# Altium PCB CMSIS-DAPF103.PcbDoc (part 2 of 2)
Units mil, origin at the board's own origin, x right, y up, seen from the top; angles counter-clockwise.
Board outline 6000 x 4000 mil, 2 copper layers (Top Layer, Bottom Layer); 33 components, 24 nets, 133 pads, 37 vias.
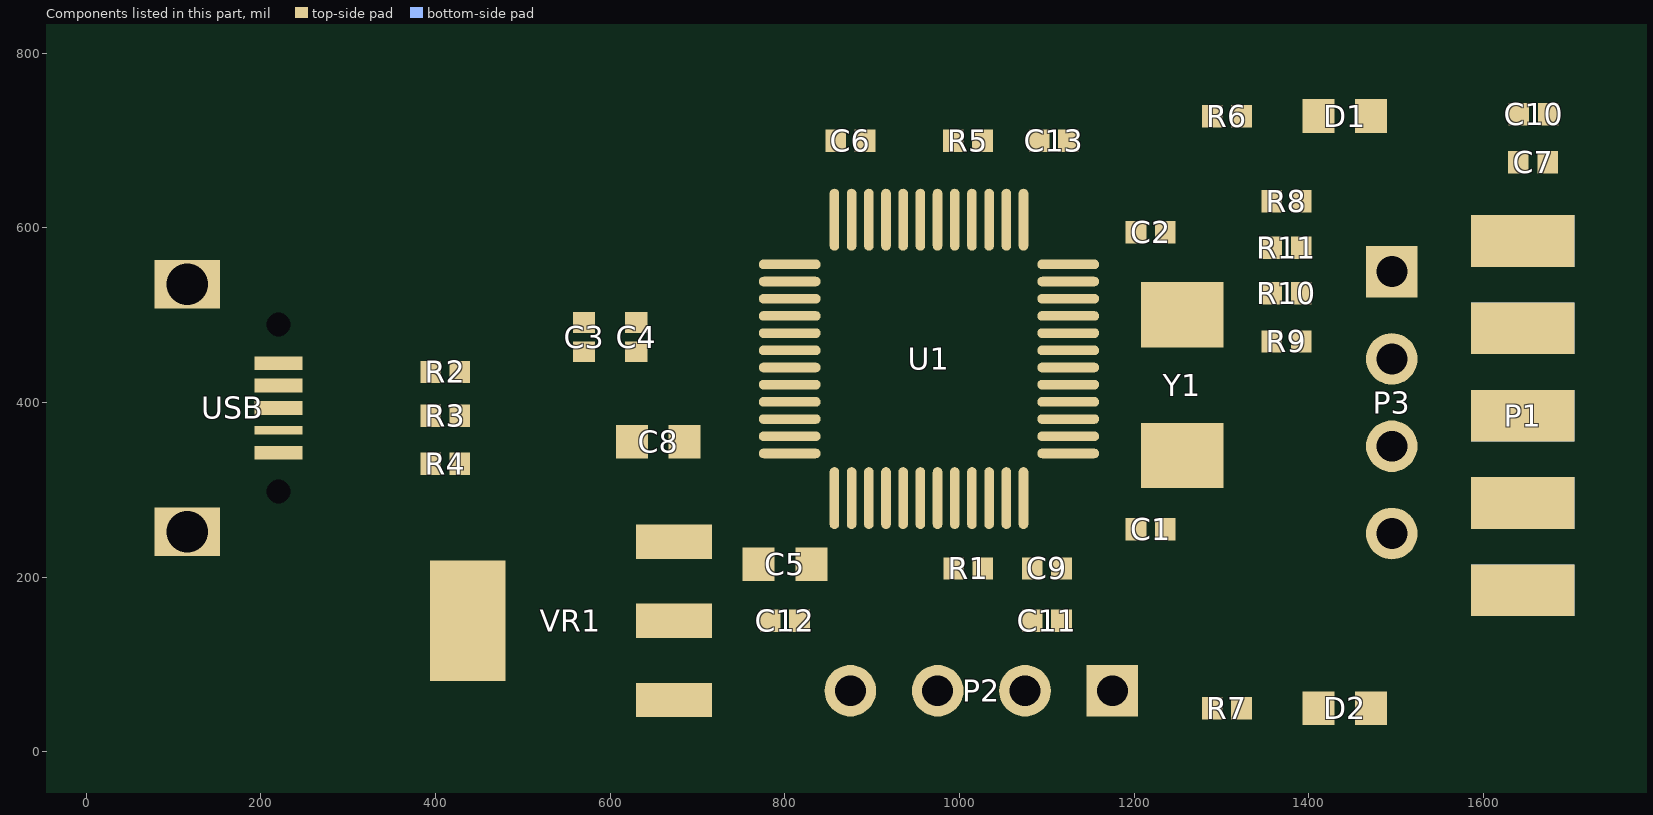
[diagram p2: the components of this part, seen from the top]

## Via types
v1: diameter 25.59, hole 11.81, Top Layer to Bottom Layer, tented both sides, 23 vias
v2: diameter 23.62, hole 11.81, Top Layer to Bottom Layer, tented both sides, 12 vias
v3: diameter 50, hole 28, Top Layer to Bottom Layer, tented both sides, 2 vias

## Nets (pads, with @x,y where several pads share a name; then routed paths per layer and width w, separated by ;. In a path a pad name is that pad's centre, name@x,y a point inside that pad or via, vN(x,y) a via of type N, cw(c..) or ccw(c..) an arc to the next point about the centre after c; other vN are vias at no path point) (continued)
copper on no net: | length 28658
  Top Layer w1: 261,612 263,612 ; 261,613 263,613 ; 261,614 263,614 ; 261,615 263,615 ; 261,616 263,616 ; 261,617 263,617 ; 261,618 263,618 ; 261,619 263,619 ; 261,620 263,620 ; 261,621 263,621 ; 261,622 263,622 ; 261,623 263,623 ; 261,624 263,624 ; 261,625 263,625 ; 261,626 263,626 ; 261,627 263,627 ; 261,628 263,628 ; 262,601 264,601 ; 262,602 264,602 ; 262,603 264,603 ; 262,604 264,604 ; 262,605 264,605 ; 262,606 264,606 ; 262,607 264,607 ; 262,608 264,608 ; 262,609 264,609 ; 262,610 263,610 ; 262,611 263,611 ; 262,629 263,629 ; 262,630 263,630 ; 262,631 263,631 ; 262,632 264,632 ; 262,633 264,633 ; 262,634 264,634 ; 262,635 264,635 ; 262,636 264,636 ; 262,637 264,637 ; 262,638 264,638 ; 262,639 264,639 ; 263,594 265,594 ; 263,595 265,595 ; 263,596 265,596 ; 263,597 265,597 ; 263,598 265,598 ; 263,599 265,599 ; 263,600 264,600 ; 263,640 264,640 ; 263,641 265,641 ; 263,642 265,642 ; 263,643 265,643 ; 263,644 265,644 ; 263,645 265,645 ; 263,646 265,646 ; 264,589 266,589 ; 264,590 266,590 ; 264,591 266,591 ; 264,592 266,592 ; 264,593 266,593 ; 264,647 265,647 ; 264,648 266,648 ; 264,649 266,649 ; 264,650 266,650 ; 264,651 266,651 ; 265,585 267,585 ; 265,586 267,586 ; 265,587 267,587 ; 265,588 267,588 ; 265,652 266,652 ; 265,653 267,653 ; 265,654 267,654 ; 265,655 267,655 ; 265,656 267,656 ; 266,581 268,581 ; 266,582 268,582 ; 266,583 268,583 ; 266,584 268,584 ; 266,657 268,657 ; 266,658 268,658 ; 266,659 268,659 ; 266,660 268,660 ; 267,577 269,577 ; 267,578 269,578 ; 267,579 269,579 ; 267,580 269,580 ; 267,661 269,661 ; 267,662 269,662 ; 267,663 269,663 ; 268,574 270,574 ; 268,575 270,575 ; 268,576 270,576 ; 268,664 270,664 ; 268,665 270,665 ; 268,666 270,666 ; 268,667 271,667 ; 269,571 271,571 ; 269,572 271,572 ; 269,573 271,573 ; 269,668 271,668 ; 269,669 271,669 ; 269,670 272,670 ; 270,568 272,568 ; 270,569 272,569 ; 270,570 272,570 ; 270,671 272,671 ; 270,672 272,672 ; 270,673 273,673 ; 271,565 274,565 ; 271,566 273,566 ; 271,567 273,567 ; 271,674 273,674 ; 271,675 273,675 ; 272,563 274,563 ; 272,564 274,564 ; 272,623 274,623 ; 272,624 274,624 ; 272,625 274,625 ; 272,626 274,626 ; 272,627 274,627 ; 272,676 274,676 ; 272,677 274,677 ; 272,678 275,678 ; 273,560 276,560 ; 273,561 275,561 ; 273,562 275,562 ; 273,621 276,621 ; 273,622 275,622 ; 273,628 275,628 ; 273,629 276,629 ; 273,679 275,679 ; 273,680 275,680 ; 274,558 277,558 ; 274,559 276,559 ; 274,599 293,599 ; 274,600 292,600 ; 274,611 293,611 ; 274,612 293,612 ; 274,620 278,620 ; 274,630 291,630 ; 274,640 278,640 ; 274,641 279,641 ; 274,651 279,651 ; 274,652 278,652 ; 274,681 276,681 ; 274,682 276,682 ; 275,556 277,556 ; 275,557 277,557 ; 275,619 291,619 ; 275,631 291,631 ; 275,639 282,639 ; 275,653 281,653 ; 275,683 277,683 ; 275,684 277,684 ; 276,554 278,554 ; 276,555 278,555 ; 276,593 284,593 ; 276,594 279,594 ; 276,642 283,642 ; 276,650 283,650 ; 276,685 278,685 ; 276,686 278,686 ; 276,687 279,687 ; 277,552 279,552 ; 277,553 279,553 ; 277,618 291,618 ; 277,688 279,688 ; 277,689 280,689 ; 278,550 280,550 ; 278,551 280,551 ; 278,579 280,579 ; 278,580 282,580 ; 278,654 286,654 ; 278,690 280,690 ; 278,691 281,691 ; 279,548 282,548 ; 279,549 281,549 ; 279,581 283,581 ; 279,592 289,592 ; 279,638 286,638 ; 279,692 281,692 ; 280,546 283,546 ; 280,547 282,547 ; 280,574 285,574 ; 280,643 287,643 ; 280,649 287,649 ; 280,693 282,693 ; 280,694 282,694 ; 281,544 284,544 ; 281,545 283,545 ; 281,573 282,573 ; 281,575 287,575 ; 281,582 285,582 ; 281,695 283,695 ; 281,696 283,696 ; 282,543 284,543 ; 282,583 287,583 ; 282,589 284,589 ; 282,590 284,590 ; 282,591 294,591 ; 282,655 290,655 ; 282,697 284,697 ; 282,698 285,698 ; 283,541 286,541 ; 283,542 285,542 ; 283,584 288,584 ; 283,585 285,585 ; 283,586 285,586 ; 283,587 284,587 ; 283,588 284,588 ; 283,601 285,601 ; 283,602 285,602 ; 283,603 285,603 ; 283,604 285,604 ; 283,605 285,605 ; 283,606 285,606 ; 283,607 285,607 ; 283,608 285,608 ; 283,609 285,609 ; 283,610 285,610 ; 283,637 290,637 ; 283,699 285,699 ; 284,539 287,539 ; 284,540 286,540 ; 284,576 290,576 ; 284,644 290,644 ; 284,648 290,648 ; 284,700 286,700 ; 284,701 287,701 ; 285,538 287,538 ; 285,562 288,562 ; 285,563 290,563 ; 285,564 293,564 ; 285,702 287,702 ; 285,703 288,703 ; 286,536 289,536 ; 286,537 288,537 ; 286,565 289,565 ; 286,566 289,566 ; 286,577 292,577 ; 286,585 290,585 ; 286,636 293,636 ; 286,656 293,656 ; 286,704 288,704 ; 287,535 289,535 ; 287,567 290,567 ; 287,645 293,645 ; 287,647 292,647 ; 287,705 289,705 ; 287,706 290,706 ; 288,533 291,533 ; 288,534 290,534 ; 288,568 290,568 ; 288,569 291,569 ; 288,586 292,586 ; 288,707 291,707 ; 289,532 292,532 ; 289,570 292,570 ; 289,578 297,578 ; 289,587 293,587 ; 289,590 295,590 ; 289,708 291,708 ; 289,709 292,709 ; 290,530 293,530 ; 290,531 292,531 ; 290,565 295,565 ; 290,571 292,571 ; 290,572 293,572 ; 290,635 293,635 ; 290,646 292,646 ; 290,657 293,657 ; 290,710 293,710 ; 291,529 294,529 ; 291,573 294,573 ; 291,579 298,579 ; 291,588 295,588 ; 291,711 293,711 ; 292,528 295,528 ; 292,566 298,566 ; 292,574 294,574 ; 292,712 294,712 ; 292,713 295,713 ; 293,527 295,527 ; 293,575 295,575 ; 293,576 296,576 ; 293,589 295,589 ; 293,714 296,714 ; 294,525 297,525 ; 294,526 296,526 ; 294,543 297,543 ; 294,544 296,544 ; 294,545 296,545 ; 294,546 296,546 ; 294,547 297,547 ; 294,577 297,577 ; 294,580 298,580 ; 294,715 297,715 ; 295,524 298,524 ; 295,541 298,541 ; 295,542 297,542 ; 295,548 298,548 ; 295,567 300,567 ; 295,716 297,716 ; 296,523 299,523 ; 296,540 299,540 ; 296,549 299,549 ; 296,581 297,581 ; 296,717 298,717 ; 296,718 299,718 ; 297,522 299,522 ; 297,539 306,539 ; 297,550 300,550 ; 297,568 302,568 ; 297,719 300,719 ; 298,520 301,520 ; 298,521 300,521 ; 298,551 301,551 ; 298,720 301,720 ; 299,519 302,519 ; 299,538 304,538 ; 299,552 302,552 ; 299,721 302,721 ; 300,518 303,518 ; 300,553 303,553 ; 300,569 302,569 ; 300,722 303,722 ; 301,517 304,517 ; 301,554 304,554 ; 301,723 303,723 ; 302,516 305,516 ; 302,555 305,555 ; 302,609 313,609 ; 302,610 313,610 ; 302,611 313,611 ; 302,612 313,612 ; 302,613 313,613 ; 302,614 313,614 ; 302,615 313,615 ; 302,616 313,616 ; 302,617 313,617 ; 302,618 314,618 ; 302,619 314,619 ; 302,620 314,620 ; 302,621 314,621 ; 302,622 314,622 ; 302,623 315,623 ; 302,624 315,624 ; 302,625 315,625 ; 302,626 315,626 ; 302,627 316,627 ; 302,628 316,628 ; 302,629 316,629 ; 302,630 317,630 ; 302,631 317,631 ; 302,724 304,724 ; 303,515 306,515 ; 303,540 307,540 ; 303,556 306,556 ; 303,602 312,602 ; 303,603 312,603 ; 303,604 312,604 ; 303,605 312,605 ; 303,606 312,606 ; 303,607 312,607 ; 303,608 312,608 ; 303,632 317,632 ; 303,633 318,633 ; 303,634 318,634 ; 303,635 318,635 ; 303,636 319,636 ; 303,637 319,637 ; 303,638 320,638 ; 303,639 320,639 ; 303,725 305,725 ; 303,726 306,726 ; 304,514 307,514 ; 304,531 307,531 ; 304,557 306,557 ; 304,596 313,596 ; 304,597 313,597 ; 304,598 312,598 ; 304,599 312,599 ; 304,600 312,600 ; 304,601 312,601 ; 304,640 320,640 ; 304,641 321,641 ; 304,642 321,642 ; 304,643 322,643 ; 304,644 322,644 ; 304,727 307,727 ; 305,513 308,513 ; 305,530 306,530 ; 305,532 308,532 ; 305,541 308,541 ; 305,592 313,592 ; 305,593 313,593 ; 305,594 313,594 ; 305,595 313,595 ; 305,645 323,645 ; 305,646 323,646 ; 305,647 324,647 ; 305,648 324,648 ; 305,728 308,728 ; 306,512 309,512 ; 306,533 309,533 ; 306,542 309,542 ; 306,589 314,589 ; 306,590 313,590 ; 306,591 313,591 ; 306,649 325,649 ; 306,650 325,650 ; 306,651 326,651 ; 306,652 327,652 ; 306,729 309,729 ; 307,511 310,511 ; 307,534 310,534 ; 307,543 310,543 ; 307,585 315,585 ; 307,586 314,586 ; 307,587 314,587 ; 307,588 314,588 ; 307,653 327,653 ; 307,654 328,654 ; 307,655 328,655 ; 307,730 310,730 ; 308,510 311,510 ; 308,535 311,535 ; 308,544 311,544 ; 308,583 315,583 ; 308,584 315,584 ; 308,656 329,656 ; 308,657 330,657 ; 308,658 330,658 ; 308,731 311,731 ; 309,509 312,509 ; 309,536 312,536 ; 309,545 312,545 ; 309,580 316,580 ; 309,581 316,581 ; 309,582 315,582 ; 309,659 331,659 ; 309,660 332,660 ; 309,661 333,661 ; 309,723 314,723 ; 309,724 314,724 ; 309,732 312,732 ; 310,508 313,508 ; 310,537 313,537 ; 310,546 313,546 ; 310,577 317,577 ; 310,578 317,578 ; 310,579 316,579 ; 310,662 333,662 ; 310,663 334,663 ; 310,722 315,722 ; 310,725 312,725 ; 311,507 314,507 ; 311,538 314,538 ; 311,547 314,547 ; 311,575 318,575 ; 311,576 317,576 ; 311,664 335,664 ; 311,665 336,665 ; 311,699 315,699 ; 311,700 315,700 ; 311,701 315,701 ; 311,710 314,710 ; 311,721 316,721 ; 311,733 314,733 ; 312,506 315,506 ; 312,539 315,539 ; 312,548 315,548 ; 312,573 319,573 ; 312,574 318,574 ; 312,666 336,666 ; 312,667 337,667 ; 312,668 338,668 ; 312,702 316,702 ; 312,711 315,711 ; 312,712 315,712 ; 312,720 316,720 ; 312,734 315,734 ; 313,505 316,505 ; 313,522 315,522 ; 313,523 316,523 ; 313,524 317,524 ; 313,525 318,525 ; 313,526 319,526 ; 313,540 318,540 ; 313,549 314,549 ; 313,571 319,571 ; 313,572 319,572 ; 313,669 339,669 ; 313,670 340,670 ; 313,703 316,703 ; 313,704 316,704 ; 313,713 315,713 ; 313,714 316,714 ; 313,715 315,715 ; 313,719 317,719 ; 313,735 316,735 ; 314,504 318,504 ; 314,527 316,527 ; 314,528 316,528 ; 314,529 316,529 ; 314,530 316,530 ; 314,531 316,531 ; 314,541 318,541 ; 314,569 321,569 ; 314,570 320,570 ; 314,671 341,671 ; 314,672 342,672 ; 314,705 318,705 ; 314,718 317,718 ; 314,736 317,736 ; 315,532 317,532 ; 315,533 317,533 ; 315,534 317,534 ; 315,535 317,535 ; 315,536 317,536 ; 315,542 319,542 ; 315,567 322,567 ; 315,568 321,568 ; 315,673 343,673 ; 315,674 344,674 ; 315,706 317,706 ; 315,707 318,707 ; 315,717 318,717 ; 315,737 318,737 ; 316,503 319,503 ; 316,537 318,537 ; 316,538 318,538 ; 316,539 318,539 ; 316,543 318,543 ; 316,565 324,565 ; 316,566 323,566 ; 316,675 345,675 ; 316,708 321,708 ; 316,709 320,709 ; 316,716 319,716 ; 316,738 319,738 ; 317,502 320,502 ; 317,527 320,527 ; 317,563 326,563 ; 317,564 325,564 ; 317,676 346,676 ; 317,677 347,677 ; 317,698 319,698 ; 317,699 318,699 ; 317,710 320,710 ; 317,711 323,711 ; 317,714 321,714 ; 317,715 322,715 ; 317,739 321,739 ; 318,501 321,501 ; 318,528 321,528 ; 318,562 327,562 ; 318,678 348,678 ; 318,679 349,679 ; 318,688 321,688 ; 318,689 322,689 ; 318,695 319,695 ; 318,696 320,696 ; 318,697 320,697 ; 318,701 320,701 ; 318,702 321,702 ; 318,703 321,703 ; 318,704 321,704 ; 318,712 322,712 ; 318,713 321,713 ; 318,723 323,723 ; 319,500 323,500 ; 319,529 322,529 ; 319,560 330,560 ; 319,561 328,561 ; 319,680 350,680 ; 319,690 322,690 ; 319,691 323,691 ; 319,692 323,692 ; 319,705 326,705 ; 319,707 322,707 ; 319,722 323,722 ; 319,740 322,740 ; 320,515 321,515 ; 320,516 322,516 ; 320,517 323,517 ; 320,530 323,530 ; 320,559 331,559 ; 320,681 352,681 ; 320,682 353,682 ; 320,693 324,693 ; 320,694 324,694 ; 320,706 333,706 ; 320,716 322,716 ; 320,721 323,721 ; 320,741 323,741 ; 321,499 324,499 ; 321,518 324,518 ; 321,531 324,531 ; 321,557 335,557 ; 321,558 333,558 ; 321,683 354,683 ; 321,695 324,695 ; 321,710 324,710 ; 321,720 323,720 ; 321,742 325,742 ; 322,498 325,498 ; 322,519 325,519 ; 322,532 325,532 ; 322,556 338,556 ; 322,684 356,684 ; 322,685 357,685 ; 322,696 324,696 ; 322,697 324,697 ; 322,698 325,698 ; 322,704 325,704 ; 322,709 325,709 ; 322,719 323,719 ; 322,743 326,743 ; 323,497 327,497 ; 323,520 327,520 ; 323,533 326,533 ; 323,554 346,554 ; 323,555 341,555 ; 323,686 358,686 ; 323,699 325,699 ; 323,700 325,700 ; 323,701 325,701 ; 323,703 325,703 ; 323,708 326,708 ; 324,496 328,496 ; 324,521 327,521 ; 324,534 327,534 ; 324,553 462,553 ; 324,687 360,687 ; 324,688 362,688 ; 324,702 325,702 ; 324,707 327,707 ; 324,744 327,744 ; 325,522 328,522 ; 325,535 326,535 ; 325,552 461,552 ; 325,689 364,689 ; 325,745 329,745 ; 326,495 329,495 ; 326,523 329,523 ; 326,550 460,550 ; 326,551 461,551 ; 326,690 365,690 ; 327,494 331,494 ; 327,524 330,524 ; 327,549 459,549 ; 327,691 406,691 ; 327,705 333,705 ; 327,711 329,711 ; 327,712 328,712 ; 327,746 330,746 ; 328,507 333,507 ; 328,508 335,508 ; 328,525 332,525 ; 328,548 459,548 ; 328,692 407,692 ; 328,693 409,693 ; 328,707 332,707 ; 328,708 331,708 ; 328,709 331,709 ; 328,710 330,710 ; 328,747 332,747 ; 329,493 332,493 ; 329,506 331,506 ; 329,509 331,509 ; 329,510 331,510 ; 329,526 332,526 ; 329,547 458,547 ; 329,694 410,694 ; 329,704 334,704 ; 330,492 334,492 ; 330,511 332,511 ; 330,512 332,512 ; 330,513 332,513 ; 330,527 333,527 ; 330,546 458,546 ; 330,695 411,695 ; 330,702 334,702 ; 330,703 334,703 ; 330,748 333,748 ; 331,514 333,514 ; 331,515 333,515 ; 331,516 333,516 ; 331,528 334,528 ; 331,544 456,544 ; 331,545 457,545 ; 331,696 413,696 ; 331,749 335,749 ; 332,491 336,491 ; 332,517 334,517 ; 332,518 334,518 ; 332,519 335,519 ; 332,543 455,543 ; 332,697 414,697 ; 332,701 334,701 ; 333,490 337,490 ; 333,509 336,509 ; 333,520 335,520 ; 333,521 335,521 ; 333,522 336,522 ; 333,542 455,542 ; 333,698 415,698 ; 333,750 336,750 ; 334,510 338,510 ; 334,523 336,523 ; 334,524 336,524 ; 334,525 336,525 ; 334,541 454,541 ; 334,699 417,699 ; 334,751 338,751 ; 335,489 339,489 ; 335,540 453,540 ; 335,700 418,700 ; 336,511 340,511 ; 336,539 452,539 ; 336,701 420,701 ; 336,752 340,752 ; 337,488 341,488 ; 337,538 452,538 ; 337,702 421,702 ; 338,487 342,487 ; 338,499 341,499 ; 338,512 342,512 ; 338,537 451,537 ; 338,703 423,703 ; 338,753 342,753 ; 339,498 343,498 ; 339,500 342,500 ; 339,536 450,536 ; 339,704 424,704 ; 339,754 344,754 ; 340,486 344,486 ; 340,501 343,501 ; 340,502 343,502 ; 340,513 344,513 ; 340,705 426,705 ; 341,497 344,497 ; 341,503 344,503 ; 341,535 449,535 ; 341,706 428,706 ; 341,755 345,755 ; 342,485 346,485 ; 342,496 345,496 ; 342,504 349,504 ; 342,514 346,514 ; 342,534 448,534 ; 342,707 429,707 ; 343,495 347,495 ; 343,505 347,505 ; 343,515 347,515 ; 343,533 447,533 ; 343,746 346,746 ; 343,747 345,747 ; 343,748 344,748 ; 343,756 347,756 ; 344,484 348,484 ; 344,494 348,494 ; 344,506 347,506 ; 344,507 347,507 ; 344,532 446,532 ; 344,708 431,708 ; 344,741 347,741 ; 344,742 347,742 ; 344,743 346,743 ; 344,744 346,744 ; 344,745 346,745 ; 345,508 348,508 ; 345,516 346,516 ; 345,709 433,709 ; 345,740 346,740 ; 345,757 349,757 ; 346,483 350,483 ; 346,493 349,493 ; 346,509 349,509 ; 346,531 445,531 ; 346,710 435,710 ; 346,737 350,737 ; 347,492 350,492 ; 347,503 350,503 ; 347,510 350,510 ; 347,511 353,511 ; 347,530 444,530 ; 347,624 364,624 ; 347,625 364,625 ; 347,626 365,626 ; 347,627 365,627 ; 347,734 351,734 ; 347,735 351,735 ; 347,736 350,736 ; 347,738 348,738 ; 347,758 352,758 ; 348,482 353,482 ; 348,491 349,491 ; 348,502 351,502 ; 348,512 351,512 ; 348,529 443,529 ; 348,612 363,612 ; 348,613 363,613 ; 348,614 363,614 ; 348,615 363,615 ; 348,616 363,616 ; 348,617 364,617 ; 348,618 364,618 ; 348,619 364,619 ; 348,620 364,620 ; 348,621 364,621 ; 348,622 364,622 ; 348,623 364,623 ; 348,628 365,628 ; 348,629 365,629 ; 348,630 366,630 ; 348,631 366,631 ; 348,632 366,632 ; 348,633 366,633 ; 348,634 367,634 ; 348,635 367,635 ; 348,636 367,636 ; 348,637 368,637 ; 348,638 368,638 ; 348,639 368,639 ; 348,640 369,640 ; 348,711 437,711 ; 348,728 352,728 ; 348,729 352,729 ; 348,730 352,730 ; 348,731 352,731 ; 348,732 351,732 ; 348,733 351,733 ; 349,501 353,501 ; 349,513 350,513 ; 349,607 364,607 ; 349,608 363,608 ; 349,609 363,609 ; 349,610 363,610 ; 349,611 363,611 ; 349,641 369,641 ; 349,642 369,642 ; 349,643 370,643 ; 349,644 370,644 ; 349,645 371,645 ; 349,646 371,646 ; 349,712 439,712 ; 349,725 352,725 ; 349,726 352,726 ; 349,727 352,727 ; 349,759 354,759 ; 350,481 355,481 ; 350,528 442,528 ; 350,604 364,604 ; 350,605 364,605 ; 350,606 364,606 ; 350,647 371,647 ; 350,648 372,648 ; 350,649 372,649 ; 350,650 373,650 ; 350,651 373,651 ; 350,713 441,713 ; 350,720 353,720 ; 350,721 353,721 ; 350,722 353,722 ; 350,723 353,723 ; 350,724 352,724 ; 350,741 351,741 ; 350,742 354,742 ; 351,500 354,500 ; 351,510 354,510 ; 351,527 441,527 ; 351,600 364,600 ; 351,601 364,601 ; 351,602 364,602 ; 351,603 364,603 ; 351,652 374,652 ; 351,653 375,653 ; 351,654 375,654 ; 351,655 376,655 ; 351,743 354,743 ; 351,760 356,760 ; 352,480 357,480 ; 352,499 354,499 ; 352,509 355,509 ; 352,598 365,598 ; 352,599 365,599 ; 352,656 376,656 ; 352,657 377,657 ; 352,658 377,658 ; 352,714 443,714 ; 352,744 360,744 ; 352,745 360,745 ; 352,748 357,748 ; 352,749 357,749 ; 352,752 354,752 ; 353,508 356,508 ; 353,526 440,526 ; 353,595 366,595 ; 353,596 365,596 ; 353,597 365,597 ; 353,659 378,659 ; 353,660 379,660 ; 353,661 379,661 ; 353,715 445,715 ; 353,746 359,746 ; 353,747 357,747 ; 353,751 357,751 ; 354,479 360,479 ; 354,525 439,525 ; 354,593 366,593 ; 354,594 366,594 ; 354,662 380,662 ; 354,663 381,663 ; 354,664 381,664 ; 354,733 356,733 ; 354,734 357,734 ; 354,735 364,735 ; 354,739 356,739 ; 354,740 356,740 ; 354,741 360,741 ; 354,750 357,750 ; 354,761 358,761 ; 355,489 358,489 ; 355,507 358,507 ; 355,591 367,591 ; 355,592 367,592 ; 355,665 382,665 ; 355,666 383,666 ; 355,667 383,667 ; 355,716 448,716 ; 355,736 357,736 ; 355,737 357,737 ; 355,738 360,738 ; 355,743 359,743 ; 355,752 357,752 ; 355,753 357,753 ; 355,754 357,754 ; 355,755 357,755 ; 356,488 357,488 ; 356,490 358,490 ; 356,491 359,491 ; 356,506 359,506 ; 356,524 438,524 ; 356,590 367,590 ; 356,668 384,668 ; 356,669 385,669 ; 356,670 386,670 ; 356,742 359,742 ; 356,762 361,762 ; 357,478 362,478 ; 357,492 359,492 ; 357,493 359,493 ; 357,494 360,494 ; 357,505 360,505 ; 357,523 437,523 ; 357,588 368,588 ; 357,589 368,589 ; 357,671 386,671 ; 357,672 387,672 ; 357,717 450,717 ; 357,731 361,731 ; 358,495 365,495 ; 358,496 362,496 ; 358,587 369,587 ; 358,673 388,673 ; 358,674 389,674 ; 358,718 453,718 ; 358,732 361,732 ; 358,733 362,733 ; 358,736 361,736 ; 358,737 364,737 ; 358,739 361,739 ; 358,740 361,740 ; 358,763 364,763 ; 359,477 365,477 ; 359,497 361,497 ; 359,498 362,498 ; 359,522 470,522 ; 359,585 370,585 ; 359,586 370,586 ; 359,675 390,675 ; 359,676 391,676 ; 359,677 392,677 ; 359,727 360,727 ; 359,728 361,728 ; 359,729 361,729 ; 359,730 361,730 ; 359,734 363,734 ; 360,499 362,499 ; 360,500 362,500 ; 360,501 363,501 ; 360,584 371,584 ; 360,678 393,678 ; 360,679 394,679 ; 360,719 455,719 ; 361,502 363,502 ; 361,503 367,503 ; 361,521 469,521 ; 361,583 372,583 ; 361,680 394,680 ; 361,681 395,681 ; 361,764 367,764 ; 362,476 368,476 ; 362,494 367,494 ; 362,504 365,504 ; 362,582 373,582 ; 362,682 396,682 ; 362,683 397,683 ; 362,720 468,720 ; 362,736 364,736 ; 363,520 467,520 ; 363,581 374,581 ; 363,684 398,684 ; 363,732 364,732 ; 363,738 364,738 ; 364,493 372,493 ; 364,554 462,554 ; 364,580 375,580 ; 364,685 400,685 ; 364,686 401,686 ; 364,721 466,721 ; 364,727 365,727 ; 364,728 367,728 ; 364,729 367,729 ; 364,730 367,730 ; 364,731 366,731 ; 364,765 370,765 ; 365,475 371,475 ; 365,492 368,492 ; 365,502 369,502 ; 365,519 465,519 ; 365,579 377,579 ; 365,687 402,687 ; 365,688 403,688 ; 366,487 369,487 ; 366,488 369,488 ; 366,489 368,489 ; 366,490 368,490 ; 366,491 368,491 ; 366,578 378,578 ; 366,689 404,689 ; 366,690 405,690 ; 366,722 464,722 ; 366,766 373,766 ; 367,483 370,483 ; 367,484 369,484 ; 367,485 369,485 ; 367,486 369,486 ; 367,501 371,501 ; 367,518 463,518 ; 368,474 375,474 ; 368,577 380,577 ; 368,723 462,723 ; 369,492 370,492 ; 369,500 373,500 ; 369,517 461,517 ; 369,576 382,576 ; 370,494 373,494 ; 370,555 463,555 ; 370,724 459,724 ; 370,767 377,767 ; 371,473 378,473 ; 371,495 374,495 ; 371,499 374,499 ; 371,516 458,516 ; 371,575 385,575 ; 372,496 374,496 ; 372,497 374,497 ; 372,498 374,498 ; 373,574 388,574 ; 373,725 457,725 ; 373,768 381,768 ; 374,515 456,515 ; 375,472 383,472 ; 375,556 463,556 ; 375,573 393,573 ; 375,726 454,726 ; 376,483 379,483 ; 376,484 378,484 ; 376,485 378,485 ; 376,486 377,486 ; 376,493 379,493 ; 376,494 378,494 ; 376,495 378,495 ; 376,514 453,514 ; 377,482 388,482 ; 377,491 383,491 ; 377,492 380,492 ; 377,496 379,496 ; 377,497 381,497 ; 377,572 469,572 ; 377,769 385,769 ; 378,498 387,498 ; 378,557 464,557 ; 378,727 451,727 ; 379,471 388,471 ; 379,481 387,481 ; 379,490 387,490 ; 379,513 450,513 ; 381,499 384,499 ; 381,571 406,571 ; 381,728 448,728 ; 381,770 391,770 ; 382,489 388,489 ; 382,558 464,558 ; 383,470 394,470 ; 383,512 447,512 ; 384,497 388,497 ; 384,729 445,729 ; 385,559 465,559 ; 386,483 389,483 ; 386,488 389,488 ; 386,496 389,496 ; 386,511 443,511 ; 386,570 400,570 ; 386,756 394,756 ; 386,771 399,771 ; 387,484 390,484 ; 387,487 390,487 ; 387,494 389,494 ; 387,495 389,495 ; 387,560 465,560 ; 387,755 390,755 ; 387,757 394,757 ; 388,469 403,469 ; 388,485 390,485 ; 388,486 390,486 ; 388,730 441,730 ; 388,746 394,746 ; 388,747 395,747 ; 389,738 392,738 ; 389,739 393,739 ; 389,740 393,740 ; 389,741 393,741 ; 389,742 393,742 ; 389,758 394,758 ; 390,561 465,561 ; 390,743 393,743 ; 390,748 395,748 ; 390,759 394,759 ; 391,510 439,510 ; 391,744 393,744 ; 391,745 394,745 ; 391,749 393,749 ; 391,750 393,750 ; 391,751 393,751 ; 391,752 393,752 ; 391,753 393,753 ; 391,754 393,754 ; 391,755 393,755 ; 392,562 466,562 ; 392,772 438,772 ; 393,731 437,731 ; 394,563 466,563 ; 395,468 435,468 ; 395,509 434,509 ; 395,759 397,759 ; 395,760 396,760 ; 396,754 405,754 ; 396,755 405,755 ; 396,756 399,756 ; 396,757 399,757 ; 396,758 398,758 ; 397,478 399,478 ; 397,479 399,479 ; 397,480 399,480 ; 397,481 399,481 ; 397,482 399,482 ; 397,483 399,483 ; 397,484 399,484 ; 397,485 399,485 ; 397,486 399,486 ; 397,487 399,487 ; 397,488 399,488 ; 397,489 399,489 ; 397,490 399,490 ; 397,491 399,491 ; 397,492 399,492 ; 397,493 399,493 ; 397,494 399,494 ; 397,495 399,495 ; 397,496 399,496 ; 397,564 467,564 ; 397,744 403,744 ; 398,743 402,743 ; 398,745 404,745 ; 398,760 403,760 ; 399,565 467,565 ; 399,732 431,732 ; 399,738 407,738 ; 399,739 408,739 ; 399,740 408,740 ; 399,741 402,741 ; 399,742 402,742 ; 399,746 404,746 ; 399,747 404,747 ; 399,748 401,748 ; 399,749 401,749 ; 399,750 402,750 ; 399,751 402,751 ; 399,752 404,752 ; 399,761 403,761 ; 399,773 430,773 ; 400,753 404,753 ; 400,756 405,756 ; 400,762 403,762 ; 401,566 467,566 ; 401,757 403,757 ; 401,758 402,758 ; 401,759 403,759 ; 401,763 404,763 ; 402,567 468,567 ; 402,764 410,764 ; 403,495 417,495 ; 403,496 418,496 ; 403,508 427,508 ; 403,765 410,765 ; 404,568 468,568 ; 404,741 407,741 ; 404,757 406,757 ; 404,758 406,758 ; 405,759 406,759 ; 405,760 407,760 ; 405,761 408,761 ; 405,762 409,762 ; 405,763 409,763 ; 405,766 409,766 ; 406,467 424,467 ; 406,569 468,569 ; 406,767 407,767 ; 408,570 469,570 ; 409,479 411,479 ; 409,480 411,480 ; 409,481 411,481 ; 409,482 411,482 ; 409,483 411,483 ; 409,484 411,484 ; 409,485 411,485 ; 409,486 411,486 ; 409,487 411,487 ; 409,488 411,488 ; 409,489 411,489 ; 409,490 411,490 ; 409,491 411,491 ; 409,492 411,492 ; 409,493 411,493 ; 409,494 411,494 ; 409,571 469,571 ; 409,630 425,630 ; 409,631 427,631 ; 409,632 428,632 ; 409,633 429,633 ; 409,634 431,634 ; 409,635 432,635 ; 409,636 433,636 ; 409,637 435,637 ; 409,638 436,638 ; 409,639 438,639 ; 409,640 439,640 ; 409,641 440,641 ; 409,642 442,642 ; 409,643 443,643 ; 409,644 445,644 ; 410,625 419,625 ; 410,626 420,626 ; 410,627 421,627 ; 410,628 422,628 ; 410,629 424,629 ; 410,645 446,645 ; 410,646 448,646 ; 410,647 449,647 ; 410,648 451,648 ; 410,649 453,649 ; 410,650 454,650 ; 410,651 456,651 ; 410,733 420,733 ; 411,622 415,622 ; 411,623 416,623 ; 411,624 417,624 ; 411,652 457,652 ; 411,653 459,653 ; 411,654 461,654 ; 411,655 463,655 ; 412,619 462,619 ; 412,620 460,620 ; 412,621 459,621 ; 412,656 465,656 ; 412,657 467,657 ; 412,658 470,658 ; 412,659 472,659 ; 413,617 464,617 ; 413,618 463,618 ; 413,660 475,660 ; 413,661 478,661 ; 413,662 481,662 ; 414,573 469,573 ; 414,615 466,615 ; 414,616 465,616 ; 414,663 485,663 ; 414,664 490,664 ; 414,665 518,665 ; 415,613 467,613 ; 415,614 466,614 ; 415,666 518,666 ; 415,667 518,667 ; 416,612 467,612 ; 416,668 517,668 ; 416,669 517,669 ; 416,670 516,670 ; 417,610 468,610 ; 417,611 468,611 ; 417,622 457,622 ; 417,671 516,671 ; 417,672 515,672 ; 418,609 468,609 ; 418,673 515,673 ; 418,674 514,674 ; 419,608 469,608 ; 419,675 514,675 ; 419,676 513,676 ; 420,607 469,607 ; 420,677 512,677 ; 420,678 512,678 ; 421,574 469,574 ; 421,606 469,606 ; 421,623 454,623 ; 421,679 511,679 ; 421,680 511,680 ; 422,494 425,494 ; 422,495 424,495 ; 422,605 469,605 ; 422,681 510,681 ; 422,682 509,682 ; 422,744 446,744 ; 423,493 426,493 ; 423,604 470,604 ; 423,683 509,683 ; 423,742 431,742 ; 423,743 437,743 ; 423,745 446,745 ; 424,491 427,491 ; 424,492 426,492 ; 424,603 470,603 ; 424,684 508,684 ; 424,685 507,685 ; 424,741 428,741 ; 425,490 428,490 ; 425,686 507,686 ; 425,687 506,687 ; 425,740 426,740 ; 426,469 441,469 ; 426,488 429,488 ; 426,489 428,489 ; 426,575 470,575 ; 426,602 470,602 ; 426,624 451,624 ; 426,688 505,688 ; 427,487 432,487 ; 427,601 470,601 ; 427,689 504,689 ; 427,690 504,690 ; 428,485 431,485 ; 428,486 432,486 ; 428,691 503,691 ; 429,477 430,477 ; 429,478 431,478 ; 429,479 431,479 ; 429,480 431,480 ; 429,481 431,481 ; 429,482 431,482 ; 429,483 431,483 ; 429,484 431,484 ; 429,600 470,600 ; 429,692 502,692 ; 429,693 501,693 ; 430,694 500,694 ; 431,488 433,488 ; 431,489 434,489 ; 431,576 470,576 ; 431,599 470,599 ; 431,695 499,695 ; 431,771 444,771 ; 432,490 434,490 ; 432,696 498,696 ; 432,697 498,697 ; 432,746 439,746 ; 433,491 435,491 ; 433,492 436,492 ; 433,598 471,598 ; 433,698 497,698 ; 434,493 436,493 ; 434,577 470,577 ; 434,699 496,699 ; 434,747 439,747 ; 434,758 443,758 ; 434,759 437,759 ; 435,470 447,470 ; 435,494 437,494 ; 435,495 438,495 ; 435,597 471,597 ; 435,625 443,625 ; 435,700 495,700 ; 435,748 440,748 ; 435,755 440,755 ; 435,756 448,756 ; 435,757 447,757 ; 436,701 494,701 ; 436,749 441,749 ; 437,702 493,702 ; 437,703 492,703 ; 438,523 443,523 ; 438,578 470,578 ; 438,704 490,704 ; 438,750 442,750 ; 439,596 471,596 ; 439,705 489,705 ; 439,751 443,751 ; 439,770 449,770 ; 440,706 488,706 ; 440,752 444,752 ; 441,524 442,524 ; 441,579 470,579 ; 441,707 487,707 ; 442,471 451,471 ; 442,595 471,595 ; 442,708 486,708 ; 442,753 445,753 ; 443,709 485,709 ; 443,746 446,746 ; 443,754 448,754 ; 444,523 472,523 ; 444,755 448,755 ; 444,758 446,758 ; 444,769 453,769 ; 445,580 470,580 ; 445,710 483,710 ; 446,524 474,524 ; 446,594 471,594 ; 446,711 482,711 ; 447,472 455,472 ; 447,491 450,491 ; 447,492 450,492 ; 447,493 450,493 ; 447,494 450,494 ; 447,525 476,525 ; 447,581 471,581 ; 447,712 481,712 ; 448,488 451,488 ; 448,489 450,489 ; 448,490 450,490 ; 448,495 450,495 ; 448,496 450,496 ; 448,497 451,497 ; 448,526 477,526 ; 448,713 479,713 ; 449,486 452,486 ; 449,487 451,487 ; 449,498 452,498 ; 449,527 452,527 ; 449,714 478,714 ; 449,768 457,768 ; 450,485 454,485 ; 450,499 453,499 ; 450,528 453,528 ; 450,582 471,582 ; 451,473 459,473 ; 451,500 456,500 ; 451,529 453,529 ; 451,715 476,715 ; 452,484 461,484 ; 452,501 460,501 ; 452,530 453,530 ; 452,716 475,716 ; 453,531 454,531 ; 453,583 471,583 ; 453,593 471,593 ; 453,767 460,767 ; 454,483 458,483 ; 454,717 473,717 ; 455,474 462,474 ; 455,527 478,527 ; 455,584 471,584 ; 456,528 480,528 ; 456,718 471,718 ; 457,500 461,500 ; 457,719 469,719 ; 457,766 463,766 ; 458,475 465,475 ; 458,485 462,485 ; 458,529 481,529 ; 458,585 471,585 ; 459,499 463,499 ; 459,530 483,530 ; 459,531 484,531 ; 460,486 463,486 ; 460,532 485,532 ; 460,586 471,586 ; 460,765 466,765 ; 461,487 464,487 ; 461,497 464,497 ; 461,498 463,498 ; 461,533 486,533 ; 462,476 468,476 ; 462,488 464,488 ; 462,489 464,489 ; 462,490 465,490 ; 462,494 465,494 ; 462,495 465,495 ; 462,496 464,496 ; 462,534 488,534 ; 462,535 489,535 ; 462,587 471,587 ; 463,491 465,491 ; 463,492 465,492 ; 463,493 465,493 ; 463,536 490,536 ; 463,537 491,537 ; 463,764 469,764 ; 464,538 465,538 ; 464,728 472,728 ; 465,477 470,477 ; 465,588 471,588 ; 465,727 470,727 ; 466,735 479,735 ; 466,736 481,736 ; 466,763 471,763 ; 467,478 473,478 ; 467,503 470,503 ; 467,504 469,504 ; 467,505 470,505 ; 467,506 472,506 ; 467,538 492,538 ; 467,589 471,589 ; 467,734 478,734 ; 468,501 471,501 ; 468,502 470,502 ; 468,539 470,539 ; 468,540 470,540 ; 468,729 473,729 ; 468,733 472,733 ; 468,762 474,762 ; 469,498 474,498 ; 469,499 476,499 ; 469,500 471,500 ; 469,507 475,507 ; 469,541 471,541 ; 469,542 471,542 ; 469,590 471,590 ; 470,479 475,479 ; 470,496 472,496 ; 470,497 472,497 ; 470,543 471,543 ; 470,544 472,544 ; 471,493 474,493 ; 471,494 473,494 ; 471,495 473,495 ; 471,539 493,539 ; 471,545 472,545 ; 471,546 472,546 ; 471,547 472,547 ; 471,730 474,730 ; 471,761 476,761 ; 472,480 477,480 ; 472,490 475,490 ; 472,491 474,491 ; 472,492 474,492 ; 472,508 477,508 ; 472,540 473,540 ; 472,541 473,541 ; 472,731 475,731 ; 473,489 474,489 ; 473,732 476,732 ; 474,500 479,500 ; 474,509 478,509 ; 474,733 478,733 ; 474,760 478,760 ; 475,481 480,481 ; 475,540 494,540 ; 475,737 486,737 ; 476,501 480,501 ; 476,541 495,541 ; 476,738 487,738 ; 476,759 480,759 ; 477,482 482,482 ; 477,510 478,510 ; 477,542 496,542 ; 477,543 497,543 ; 477,721 485,721 ; 477,722 483,722 ; 477,723 481,723 ; 477,724 480,724 ; 477,725 480,725 ; 477,726 479,726 ; 477,727 479,727 ; 477,728 479,728 ; 477,729 478,729 ; 477,730 478,730 ; 477,731 478,731 ; 477,732 478,732 ; 477,739 481,739 ; 478,502 480,502 ; 478,544 498,544 ; 478,740 481,740 ; 478,741 482,741 ; 478,742 482,742 ; 478,758 483,758 ; 479,483 484,483 ; 479,545 499,545 ; 479,546 500,546 ; 479,743 483,743 ; 479,744 483,744 ; 479,745 484,745 ; 480,547 501,547 ; 480,548 502,548 ; 480,746 484,746 ; 480,747 484,747 ; 480,757 485,757 ; 481,484 486,484 ; 481,549 502,549 ; 481,748 484,748 ; 481,749 484,749 ; 481,750 483,750 ; 482,513 484,513 ; 482,514 485,514 ; 482,550 503,550 ; 482,551 504,551 ; 482,751 483,751 ; 482,756 487,756 ; 483,485 488,485 ; 483,515 487,515 ; 483,552 487,552 ; 483,739 486,739 ; 484,553 486,553 ; 484,755 488,755 ; 485,486 489,486 ; 485,516 490,516 ; 486,517 490,517 ; 486,754 490,754 ; 487,487 491,487 ; 488,515 491,515 ; 488,518 491,518 ; 488,552 505,552 ; 488,753 492,753 ; 489,488 493,488 ; 489,513 492,513 ; 489,514 491,514 ; 489,519 493,519 ; 489,553 506,553 ; 490,512 493,512 ; 490,520 494,520 ; 490,554 506,554 ; 490,555 507,555 ; 490,752 494,752 ; 491,489 494,489 ; 491,510 494,510 ; 491,511 493,511 ; 491,556 508,556 ; 491,557 508,557 ; 491,751 495,751 ; 492,490 496,490 ; 492,509 495,509 ; 492,521 494,521 ; 492,558 509,558 ; 492,559 510,559 ; 493,507 496,507 ; 493,508 495,508 ; 493,560 510,560 ; 493,561 511,561 ; 493,750 497,750 ; 494,491 498,491 ; 494,506 497,506 ; 494,562 498,562 ; 494,563 498,563 ; 495,504 498,504 ; 495,505 497,505 ; 495,524 499,524 ; 495,564 499,564 ; 495,565 499,565 ; 495,749 498,749 ; 496,492 499,492 ; 496,503 498,503 ; 496,523 499,523 ; 496,525 499,525 ; 496,566 499,566 ; 496,567 499,567 ; 496,568 499,568 ; 496,703 503,703 ; 496,704 498,704 ; 496,705 497,705 ; 496,748 500,748 ; 497,493 501,493 ; 497,522 500,522 ; 497,526 500,526 ; 497,569 499,569 ; 497,570 499,570 ; 497,700 499,700 ; 497,701 501,701 ; 497,702 502,702 ; 497,713 502,713 ; 497,714 501,714 ; 498,521 501,521 ; 498,571 499,571 ; 498,572 499,572 ; 498,573 499,573 ; 498,711 506,711 ; 498,712 504,712 ; 498,715 499,715 ; 498,747 501,747 ; 499,494 502,494 ; 499,520 502,520 ; 499,527 502,527 ; 499,746 503,746 ; 500,495 504,495 ; 500,519 504,519 ; 500,528 503,528 ; 500,562 512,562 ; 501,518 504,518 ; 501,529 504,529 ; 501,563 512,563 ; 501,704 505,704 ; 501,710 508,710 ; 501,745 504,745 ; 502,496 505,496 ; 502,517 505,517 ; 502,530 505,530 ; 502,564 513,564 ; 502,565 513,565 ; 502,744 506,744 ; 503,497 506,497 ; 503,515 506,515 ; 503,516 506,516 ; 503,520 506,520 ; 503,531 506,531 ; 503,566 514,566 ; 503,664 519,664 ; 503,705 507,705 ; 504,498 508,498 ; 504,514 507,514 ; 504,521 507,521 ; 504,532 506,532 ; 504,567 514,567 ; 504,743 507,743 ; 505,513 511,513 ; 505,522 508,522 ; 505,568 515,568 ; 505,569 515,569 ; 505,706 508,706 ; 505,709 509,709 ; 505,742 508,742 ; 506,499 509,499 ; 506,512 509,512 ; 506,523 509,523 ; 506,570 516,570 ; 506,663 519,663 ; 506,707 514,707 ; 506,741 510,741 ; 507,500 510,500 ; 507,511 508,511 ; 507,524 510,524 ; 507,571 516,571 ; 507,572 517,572 ; 507,708 518,708 ; 508,501 511,501 ; 508,525 511,525 ; 508,573 517,573 ; 508,662 520,662 ; 508,740 511,740 ; 509,514 512,514 ; 509,526 510,526 ; 509,533 512,533 ; 509,534 511,534 ; 509,535 511,535 ; 509,536 511,536 ; 509,537 511,537 ; 509,538 511,538 ; 509,539 512,539 ; 509,574 518,574 ; 509,575 518,575 ; 509,704 513,704 ; 509,713 512,713 ; 509,714 510,714 ; 509,739 512,739 ; 510,502 513,502 ; 510,515 513,515 ; 510,531 513,531 ; 510,532 512,532 ; 510,540 512,540 ; 510,576 519,576 ; 510,577 519,577 ; 510,661 520,661 ; 510,703 513,703 ; 510,705 513,705 ; 510,712 514,712 ; 510,738 513,738 ; 511,503 514,503 ; 511,516 514,516 ; 511,530 514,530 ; 511,541 513,541 ; 511,578 520,578 ; 511,579 520,579 ; 511,660 520,660 ; 511,706 513,706 ; 511,717 512,717 ; 511,737 514,737 ; 512,504 515,504 ; 512,517 515,517 ; 512,529 515,529 ; 512,542 515,542 ; 512,580 520,580 ; 512,581 521,581 ; 512,659 521,659 ; 512,718 518,718 ; 512,719 518,719 ; 513,505 516,505 ; 513,518 516,518 ; 513,528 517,528 ; 513,543 520,543 ; 513,582 521,582 ; 513,583 521,583 ; 513,584 522,584 ; 513,658 521,658 ; 513,711 515,711 ; 513,715 515,715 ; 513,717 517,717 ; 513,720 519,720 ; 513,721 516,721 ; 513,736 516,736 ; 514,506 517,506 ; 514,519 517,519 ; 514,527 523,527 ; 514,585 522,585 ; 514,586 522,586 ; 514,657 521,657 ; 514,709 519,709 ; 514,710 517,710 ; 514,716 515,716 ; 514,722 517,722 ; 514,735 517,735 ; 515,520 517,520 ; 515,544 518,544 ; 515,587 523,587 ; 515,588 523,588 ; 515,589 523,589 ; 515,656 522,656 ; 515,707 518,707 ; 515,723 517,723 ; 515,734 518,734 ; 516,507 519,507 ; 516,590 524,590 ; 516,591 524,591 ; 516,592 524,592 ; 516,655 522,655 ; 516,713 518,713 ; 516,714 518,714 ; 516,733 519,733 ; 517,508 520,508 ; 517,526 521,526 ; 517,542 520,542 ; 517,593 524,593 ; 517,594 525,594 ; 517,595 525,595 ; 517,653 523,653 ; 517,654 523,654 ; 517,712 519,712 ; 517,715 525,715 ; 517,732 520,732 ; 518,509 521,509 ; 518,596 525,596 ; 518,597 525,597 ; 518,598 526,598 ; 518,599 526,599 ; 518,651 523,651 ; 518,652 523,652 ; 518,716 526,716 ; 518,721 519,721 ; 518,722 520,722 ; 518,731 521,731 ; 519,510 522,510 ; 519,548 523,548 ; 519,549 521,549 ; 519,600 526,600 ; 519,601 526,601 ; 519,602 526,602 ; 519,603 526,603 ; 519,648 524,648 ; 519,649 524,649 ; 519,650 524,650 ; 519,713 521,713 ; 519,717 527,717 ; 519,718 527,718 ; 519,723 520,723 ; 519,724 520,724 ; 519,725 520,725 ; 519,730 522,730 ; 520,511 523,511 ; 520,547 525,547 ; 520,604 527,604 ; 520,605 527,605 ; 520,606 527,606 ; 520,607 527,607 ; 520,608 527,608 ; 520,609 527,609 ; 520,645 525,645 ; 520,646 525,646 ; 520,647 525,647 ; 520,714 525,714 ; 520,729 523,729 ; 521,512 524,512 ; 521,528 524,528 ; 521,610 527,610 ; 521,611 527,611 ; 521,612 527,612 ; 521,613 527,613 ; 521,614 528,614 ; 521,615 528,615 ; 521,616 528,616 ; 521,617 528,617 ; 521,640 526,640 ; 521,641 526,641 ; 521,642 526,642 ; 521,643 525,643 ; 521,644 525,644 ; 521,709 528,709 ; 521,710 529,710 ; 521,719 523,719 ; 521,720 523,720 ; 521,721 523,721 ; 521,728 524,728 ; 522,513 525,513 ; 522,546 529,546 ; 522,618 528,618 ; 522,619 528,619 ; 522,620 528,620 ; 522,621 528,621 ; 522,622 528,622 ; 522,623 528,623 ; 522,624 528,624 ; 522,625 528,625 ; 522,626 528,626 ; 522,627 527,627 ; 522,628 527,628 ; 522,629 527,629 ; 522,630 527,630 ; 522,631 527,631 ; 522,632 527,632 ; 522,633 527,633 ; 522,634 527,634 ; 522,635 527,635 ; 522,636 527,636 ; 522,637 526,637 ; 522,638 526,638 ; 522,639 526,639 ; 522,727 525,727 ; 523,514 526,514 ; 523,529 525,529 ; 523,726 526,726 ; 524,515 527,515 ; 524,530 526,530 ; 524,531 527,531 ; 524,536 527,536 ; 524,545 529,545 ; 524,708 527,708 ; 524,711 529,711 ; 524,725 527,725 ; 525,516 528,516 ; 525,532 527,532 ; 525,533 527,533 ; 525,534 527,534 ; 525,535 527,535 ; 525,537 526,537 ; 525,559 528,559 ; 525,712 529,712 ; 525,713 528,713 ; 525,724 528,724 ; 526,517 528,517 ; 526,544 530,544 ; 526,558 530,558 ; 526,560 527,560 ; 526,723 529,723 ; 527,518 529,518 ; 527,543 532,543 ; 527,547 529,547 ; 527,557 532,557 ; 527,722 530,722 ; 528,519 530,519 ; 528,520 531,520 ; 528,548 530,548 ; 528,549 530,549 ; 528,721 531,721 ; 529,521 532,521 ; 529,542 534,542 ; 529,550 531,550 ; 529,551 532,551 ; 529,556 534,556 ; 529,566 534,566 ; 529,567 534,567 ; 529,568 543,568 ; 529,720 531,720 ; 530,522 533,522 ; 530,552 532,552 ; 530,553 533,553 ; 530,719 532,719 ; 531,523 534,523 ; 531,541 536,541 ; 531,554 537,554 ; 531,555 535,555 ; 531,565 536,565 ; 531,717 534,717 ; 531,718 533,718 ; 532,524 534,524 ; 532,716 535,716 ; 533,525 535,525 ; 533,526 536,526 ; 533,540 536,540 ; 533,564 538,564 ; 533,569 550,569 ; 533,715 536,715 ; 534,527 537,527 ; 534,553 539,553 ; 534,578 538,578 ; 534,714 536,714 ; 535,528 538,528 ; 535,563 540,563 ; 535,577 540,577 ; 535,579 536,579 ; 535,661 538,661 ; 535,662 536,662 ; 535,712 538,712 ; 535,713 537,713 ; 536,529 538,529 ; 536,530 539,530 ; 536,552 541,552 ; 536,647 537,647 ; 536,648 538,648 ; 536,649 540,649 ; 536,660 539,660 ; 536,711 539,711 ; 537,531 540,531 ; 537,562 542,562 ; 537,576 541,576 ; 537,586 539,586 ; 537,587 539,587 ; 537,650 541,650 ; 537,659 541,659 ; 537,710 539,710 ; 538,532 540,532 ; 538,551 542,551 ; 538,582 541,582 ; 538,583 540,583 ; 538,584 540,584 ; 538,585 539,585 ; 538,588 540,588 ; 538,589 540,589 ; 538,590 540,590 ; 538,635 540,635 ; 538,636 540,636 ; 538,637 540,637 ; 538,638 540,638 ; 538,639 540,639 ; 538,640 540,640 ; 538,641 540,641 ; 538,708 541,708 ; 538,709 540,709 ; 539,533 541,533 ; 539,534 542,534 ; 539,561 543,561 ; 539,575 543,575 ; 539,581 542,581 ; 539,591 541,591 ; 539,592 543,592 ; 539,599 557,599 ; 539,600 553,600 ; 539,633 542,633 ; 539,634 541,634 ; 539,642 541,642 ; 539,643 542,643 ; 539,651 543,651 ; 539,658 542,658 ; 539,707 541,707 ; 540,535 543,535 ; 540,550 541,550 ; 540,580 545,580 ; 540,593 553,593 ; 540,617 542,617 ; 540,618 542,618 ; 540,619 542,619 ; 540,620 542,620 ; 540,632 544,632 ; 540,644 544,644 ; 540,652 544,652 ; 540,657 544,657 ; 540,705 543,705 ; 540,706 542,706 ; 541,536 543,536 ; 541,537 544,537 ; 541,560 545,560 ; 541,574 545,574 ; 541,579 553,579 ; 541,614 544,614 ; 541,615 543,615 ; 541,616 542,616 ; 541,621 543,621 ; 541,622 544,622 ; 541,631 554,631 ; 541,645 543,645 ; 541,704 544,704 ; 542,538 544,538 ; 542,594 551,594 ; 542,613 545,613 ; 542,623 545,623 ; 542,624 546,624 ; 542,653 546,653 ; 542,656 546,656 ; 542,702 545,702 ; 542,703 544,703 ; 543,539 545,539 ; 543,540 546,540 ; 543,559 545,559 ; 543,570 551,570 ; 543,573 547,573 ; 543,612 547,612 ; 543,630 552,630 ; 543,654 554,654 ; 543,701 545,701 ; 544,541 546,541 ; 544,572 549,572 ; 544,578 551,578 ; 544,611 555,611 ; 544,625 556,625 ; 544,655 554,655 ; 544,699 547,699 ; 544,700 546,700 ; 545,542 547,542 ; 545,543 548,543 ; 545,626 555,626 ; 545,697 548,697 ; 545,698 547,698 ; 546,544 548,544 ; 546,545 549,545 ; 546,571 551,571 ; 546,610 553,610 ; 546,696 548,696 ; 547,546 549,546 ; 547,547 550,547 ; 547,639 549,639 ; 547,640 549,640 ; 547,641 549,641 ; 547,642 549,642 ; 547,643 549,643 ; 547,644 555,644 ; 547,645 555,645 ; 547,694 549,694 ; 547,695 549,695 ; 548,548 550,548 ; 548,692 551,692 ; 548,693 550,693 ; 549,549 551,549 ; 549,550 551,550 ; 549,690 552,690 ; 549,691 551,691 ; 550,551 552,551 ; 550,552 552,552 ; 550,592 554,592 ; 550,598 557,598 ; 550,688 553,688 ; 550,689 552,689 ; 551,553 553,553 ; 551,554 553,554 ; 551,580 554,580 ; 551,632 555,632 ; 551,686 554,686 ; 551,687 553,687 ; 552,555 554,555 ; 552,556 554,556 ; 552,581 555,581 ; 552,591 555,591 ; 552,612 557,612 ; 552,684 554,684 ; 552,685 554,685 ; 553,557 555,557 ; 553,558 555,558 ; 553,559 556,559 ; 553,582 555,582 ; 553,590 555,590 ; 553,633 555,633 ; 553,634 556,634 ; 553,643 556,643 ; 553,682 555,682 ; 553,683 555,683 ; 554,560 556,560 ; 554,561 556,561 ; 554,583 556,583 ; 554,584 556,584 ; 554,587 556,587 ; 554,588 556,588 ; 554,589 556,589 ; 554,624 557,624 ; 554,635 556,635 ; 554,641 556,641 ; 554,642 556,642 ; 554,680 556,680 ; 554,681 556,681 ; 555,562 557,562 ; 555,563 557,563 ; 555,585 556,585 ; 555,586 556,586 ; 555,600 557,600 ; 555,601 557,601 ; 555,602 557,602 ; 555,603 557,603 ; 555,604 557,604 ; 555,605 557,605 ; 555,606 557,606 ; 555,607 557,607 ; 555,608 557,608 ; 555,613 558,613 ; 555,623 558,623 ; 555,636 557,636 ; 555,637 557,637 ; 555,638 557,638 ; 555,639 557,639 ; 555,640 557,640 ; 555,677 557,677 ; 555,678 557,678 ; 555,679 557,679 ; 556,564 558,564 ; 556,565 558,565 ; 556,566 558,566 ; 556,609 557,609 ; 556,614 558,614 ; 556,615 559,615 ; 556,622 558,622 ; 556,675 558,675 ; 556,676 558,676 ; 557,567 559,567 ; 557,568 559,568 ; 557,569 560,569 ; 557,616 559,616 ; 557,617 559,617 ; 557,618 559,618 ; 557,619 559,619 ; 557,620 559,620 ; 557,621 559,621 ; 557,672 559,672 ; 557,673 559,673 ; 557,674 559,674 ; 558,570 560,570 ; 558,571 560,571 ; 558,669 560,669 ; 558,670 560,670 ; 558,671 560,671 ; 559,572 561,572 ; 559,573 561,573 ; 559,574 561,574 ; 559,666 561,666 ; 559,667 561,667 ; 559,668 561,668 ; 560,575 562,575 ; 560,576 562,576 ; 560,577 562,577 ; 560,578 562,578 ; 560,663 562,663 ; 560,664 562,664 ; 560,665 562,665 ; 561,579 563,579 ; 561,580 563,580 ; 561,581 563,581 ; 561,659 563,659 ; 561,660 563,660 ; 561,661 563,661 ; 561,662 563,662 ; 562,582 564,582 ; 562,583 564,583 ; 562,584 564,584 ; 562,585 564,585 ; 562,655 564,655 ; 562,656 564,656 ; 562,657 564,657 ; 562,658 564,658 ; 563,586 564,586 ; 563,587 565,587 ; 563,588 565,588 ; 563,589 565,589 ; 563,590 565,590 ; 563,651 565,651 ; 563,652 565,652 ; 563,653 565,653 ; 563,654 565,654 ; 564,591 565,591 ; 564,592 566,592 ; 564,593 566,593 ; 564,594 566,594 ; 564,595 566,595 ; 564,645 566,645 ; 564,646 566,646 ; 564,647 566,647 ; 564,648 566,648 ; 564,649 566,649 ; 564,650 565,650 ; 565,596 566,596 ; 565,597 567,597 ; 565,598 567,598 ; 565,599 567,599 ; 565,600 567,600 ; 565,601 567,601 ; 565,602 567,602 ; 565,603 567,603 ; 565,637 567,637 ; 565,638 567,638 ; 565,639 567,639 ; 565,640 567,640 ; 565,641 567,641 ; 565,642 567,642 ; 565,643 567,643 ; 565,644 566,644 ; 566,604 567,604 ; 566,605 568,605 ; 566,606 568,606 ; 566,607 568,607 ; 566,608 568,608 ; 566,609 568,609 ; 566,610 568,610 ; 566,611 568,611 ; 566,612 568,612 ; 566,613 568,613 ; 566,614 568,614 ; 566,615 568,615 ; 566,616 568,616 ; 566,617 568,617 ; 566,618 568,618 ; 566,619 568,619 ; 566,620 568,620 ; 566,621 568,621 ; 566,622 568,622 ; 566,623 568,623 ; 566,624 568,624 ; 566,625 568,625 ; 566,626 568,626 ; 566,627 568,627 ; 566,628 568,628 ; 566,629 568,629 ; 566,630 568,630 ; 566,631 568,631 ; 566,632 568,632 ; 566,633 568,633 ; 566,634 568,634 ; 566,635 568,635 ; 566,636 567,636

## Polygon pours and split planes (outlines as drawn)
GND on Bottom Layer "GND_L02_P002" (solid, remove dead copper, pour order 2): 105,787.4 45,787.4 0,787.4 0,0 55,0 1740,0 1740,787.4 1697.6,787.4

## Keep-outs
Keep-Out Layer:
  lines w10: 0,30 ccw(c30,30) 30,0 1705,0 ccw(c1705,35) 1740,35 1740,745 ccw(c1697.6,745) 1697.6,787.4 27.4,787.4 ccw(c27.4,760) 0,760 0,30

## Silkscreen, mask and mechanical layers (free items; w line width, h text height)
Top Overlay:
  text "3V3" at 1540,635 h40
  text "TXD" at 1380,405 h40
  text "RXD" at 1380.71,365 h40
  text "TMS" at 850,127.36 h40
  text "TCK" at 950,127.36 h40
  text "3V3" at 1150,127.36 h40
  text "GND" at 1535,115 h40
  text "追求卓越！" at 46.77,55 h40
Bottom Overlay:
  text "TMS" at 1595,635 h40
  text "TCK" at 1595,520 h40
  text "RST" at 1590,115 h40